# EAGLE board controller11_2 (EAGLE 9.4.1)
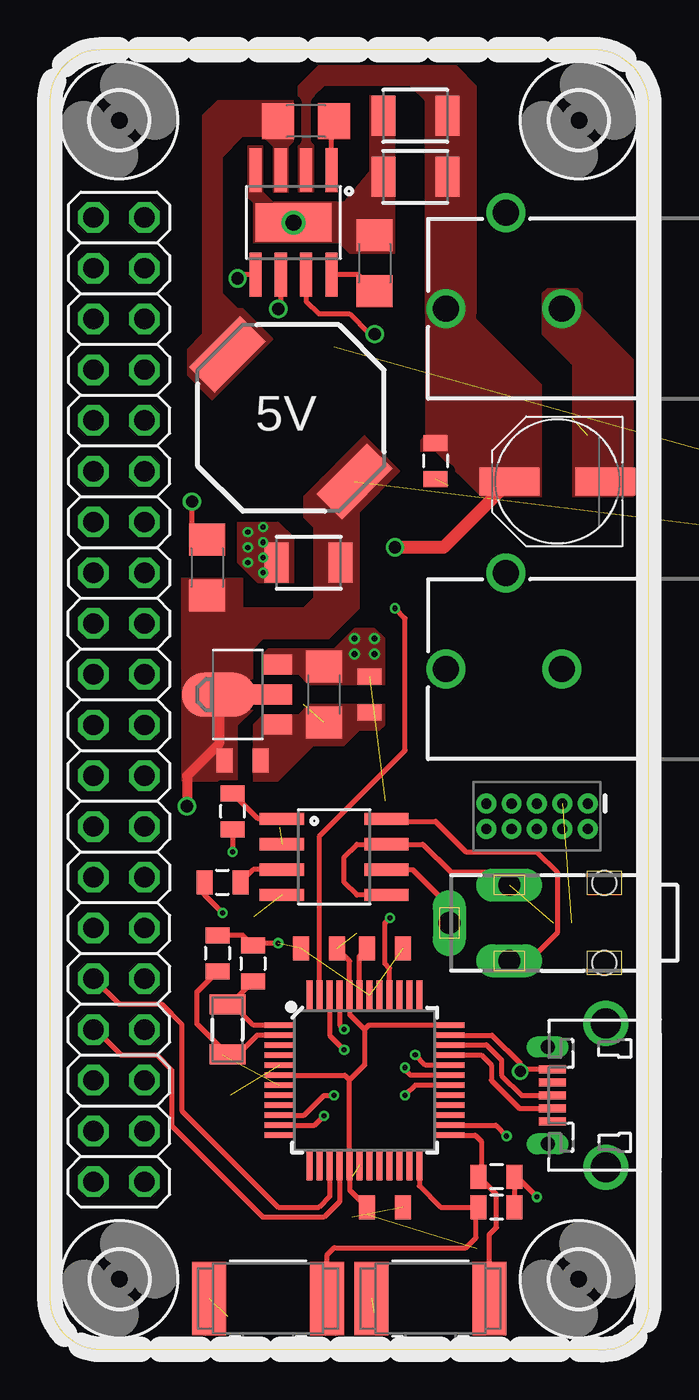
[diagram p0: board, top side]
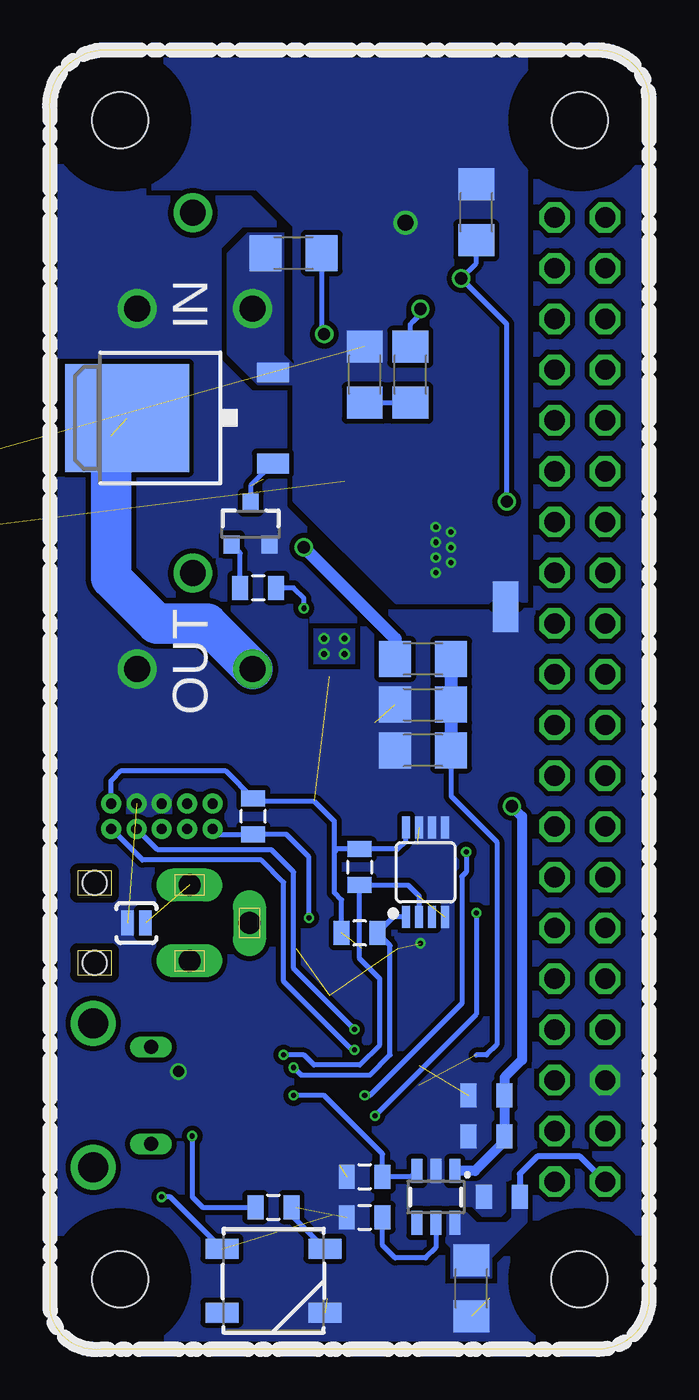
[diagram p1: board, bottom side, seen from below]

Size 29.98 x 65.04 mm. Coordinates in mm from the lower left corner, seen from the top.
Outline: 0,2.55 arc90 2.54,0.01 27.43,0.01 arc90 29.97,2.05 29.97,61.99 arc90 27.43,65.04 2.54,65.04 arc90 0,62.5 0,2.55
Copper layers (1*16): Top 0.035559375mm / dielectric 1.6mm / Bottom 0.035559375mm
Design rules "oshpark-2layer": minimum track width 6mil, minimum drill 10mil, track to track 6mil, track to pad 6mil, pad to pad 6mil, via to via 6mil, smd to smd 6mil, copper to edge 15mil, drill to drill 6mil, minimum pad ring 5mil, minimum via ring 5mil, stop-mask expansion 2.5mil, vias tented up to drill 0mil, thermal gap 10mil
Net classes: 0 default: width 0.254 mm, clearance 0.254 mm; 1 power: width 0.254 mm, clearance 0.254 mm; 2 camera_power: width 0.66 mm, clearance 0.381 mm; 3 usbsignal: width 0.254 mm, clearance 0.203 mm; 4 highpower: clearance 0.305 mm; 5 tiny: width 0.178 mm, clearance 0.178 mm

## Footprints (pad centres in the part's own frame; a part is rotated, then mirrored left to right if it is on the bottom)
SOT23-6 = smd 0.55 x 1.2: 1 0.95,1.3; 2 0,1.3; 3 -0.95,1.3; 4 -0.95,-1.3; 5 0,-1.3; 6 0.95,-1.3
0805 = smd 0.8 x 1.2: 1 -0.9,0; 2 0.9,0
1206 = smd 1.6 x 1.8: 1 -1.4,0; 2 1.4,0
PANASONIC_D = smd 3 x 1.4: + 2.4,0; - -2.4,0
1210 = smd 1.2 x 2: 1 -1.6,0; 2 1.6,0
WS2812B = smd 1.651 x 1: 1 -2.577,1.6; 2 -2.577,-1.6; 3 2.577,-1.6; 4 2.577,1.6
2,8 = hole 2.8: 0,0
SO08 = smd 0.61 x 2.21: 1 -1.905,-2.616; 2 -0.635,-2.616; 3 0.635,-2.616; 4 1.905,-2.616; 5 1.905,2.616; 6 0.635,2.616; 7 -0.635,2.616; 8 -1.905,2.616
SOT89 = smd 1 x 1.5: 1 -1.499,-1.981; 3 1.499,-1.981 | smd 1 x 2: 2 0,-1.727 | smd 2.2 x 3.7: 2@1 0,0.94
POWER_JACK_PTH_BREAD = drill 1.3: GND 0,7.9; GNDBREAK 4.8,10.7; PWR 0,13.7
2X5-PTH-1.27MM = drill 0.508 pad 1: 1 -2.54,-0.635; 2 -2.54,0.635; 3 -1.27,-0.635; 4 -1.27,0.635; 5 0,-0.635; 6 0,0.635; 7 1.27,-0.635; 8 1.27,0.635; 9 2.54,-0.635; 10 2.54,0.635
PAD-JUMPER-2-NO_YES_SILK = smd 0.635 x 1.27: 1 -0.45,0; 2 0.45,0
2X20 = drill 1.016 octagon: 1 -24.13,-1.27; 2 -24.13,1.27; 3 -21.59,-1.27; 4 -21.59,1.27; 5 -19.05,-1.27; 6 -19.05,1.27; 7 -16.51,-1.27; 8 -16.51,1.27; 9 -13.97,-1.27; 10 -13.97,1.27; 11 -11.43,-1.27; 12 -11.43,1.27; 13 -8.89,-1.27; 14 -8.89,1.27; 15 -6.35,-1.27; 16 -6.35,1.27; 17 -3.81,-1.27; 18 -3.81,1.27; 19 -1.27,-1.27; 20 -1.27,1.27; 21 1.27,-1.27; 22 1.27,1.27; 23 3.81,-1.27; 24 3.81,1.27; 25 6.35,-1.27; 26 6.35,1.27; 27 8.89,-1.27; 28 8.89,1.27; 29 11.43,-1.27; 30 11.43,1.27; 31 13.97,-1.27; 32 13.97,1.27; 33 16.51,-1.27; 34 16.51,1.27; 35 19.05,-1.27; 36 19.05,1.27; 37 21.59,-1.27; 38 21.59,1.27; 39 24.13,-1.27; 40 24.13,1.27
SRU1038 = smd 1.8 x 3.6: 1 -4.5,0; 2 4.5,0
MSOP8 = smd 0.4 x 1.1: 1 -0.975,-2.25; 2 -0.325,-2.25; 3 0.325,-2.25; 4 0.975,-2.25; 5 0.975,2.25; 6 0.325,2.25; 7 -0.325,2.25; 8 -0.975,2.25
TO252 = smd 1 x 1.6: 1 -2.28,-4.8; 2 2.28,-4.8 | smd 5.4 x 6.2: 3 0,2.5
SOT23-3 = smd 0.8 x 0.9: 1 -0.95,-1; 2 0.95,-1; 3 0,1.1
SHORT_TOP-50 = smd 1.27 x 1.27: 1 0.635,0; 2 -0.635,0
BTN_CK_KSS = smd 1.7 x 3.7: P$1 -2.95,0; P$2 2.95,0
TQFP-48 = smd 1.5 x 0.28: 1 -4.25,2.75; 2 -4.25,2.25; 3 -4.25,1.75; 4 -4.25,1.25; 5 -4.25,0.75; 6 -4.25,0.25; 7 -4.25,-0.25; 8 -4.25,-0.75; 9 -4.25,-1.25; 10 -4.25,-1.75; 11 -4.25,-2.25; 12 -4.25,-2.75; 25 4.25,-2.75; 26 4.25,-2.25; 27 4.25,-1.75; 28 4.25,-1.25; 29 4.25,-0.75; 30 4.25,-0.25; 31 4.25,0.25; 32 4.25,0.75; 33 4.25,1.25; 34 4.25,1.75; 35 4.25,2.25; 36 4.25,2.75 | smd 0.28 x 1.5: 13 -2.75,-4.25; 14 -2.25,-4.25; 15 -1.75,-4.25; 16 -1.25,-4.25; 17 -0.75,-4.25; 18 -0.25,-4.25; 19 0.25,-4.25; 20 0.75,-4.25; 21 1.25,-4.25; 22 1.75,-4.25; 23 2.25,-4.25; 24 2.75,-4.25; 37 2.75,4.25; 38 2.25,4.25; 39 1.75,4.25; 40 1.25,4.25; 41 0.75,4.25; 42 0.25,4.25; 43 -0.25,4.25; 44 -0.75,4.25; 45 -1.25,4.25; 46 -1.75,4.25; 47 -2.25,4.25; 48 -2.75,4.25
SO08' = smd 0.61 x 2.21: 1 -1.905,-2.616; 2 -0.635,-2.616; 3 0.635,-2.616; 4 1.905,-2.616; 5 1.905,2.616; 6 0.635,2.616; 7 -0.635,2.616; 8 -1.905,2.616 | smd 3.81 x 1.93: BTM 0,0 | drill 0.8: P$1 0,0
1501_05 = drill 1.1 pad 1.4 long: 1 -1.9,-8.5; 2 0,-11.5; 3 1.9,-8.5 | hole 1.2: -2,-3.75; 2,-3.75
ZX62D-B-5PA8 = smd 1.35 x 0.4: 1 4.825,1.3; 2 4.825,0.65; 3 4.825,0; 4 4.825,-0.65; 5 4.825,-1.3 | drill 1.5: S1 2.15,-3.6; S2 2.15,3.6 | drill 0.7 long: S3 5.05,2.425; S4 5.05,-2.425
CRYSTAL-SMD-3.2X1.5MM = smd 1 x 1.8: P$1 -1.25,0; P$2 1.25,0

## Placement (x,y rotation side)
AP2553  MCP4725  [SOT23-6]  10.67,7.63 0 bottom
C1  10uF  [0805]  8.13,10.68 180 bottom
C2  0.1uF  [0805]  8.13,12.71 180 bottom
C3  1.0uF  [0805]  7.37,7.63 0 bottom
C4  120uF  [1206]  8.89,3.06 90 bottom
C5  100uF  [PANASONIC_D]  25.4,43.45 180 top
C6  0.1uF  [1206]  11.3,29.99 180 bottom
C7  1.0uF  [0805]  9.65,29.48 0 top
C8  1.0uF  [1206]  13.72,32.78 270 top
C9  0.1uF  [0805]  16,32.78 270 top
C10  15pF  [0805]  10.16,19.32 270 top
C11  15pF  [0805]  8.38,19.83 270 top
C12  0.1uF  [0805]  13.46,20.08 0 top
C13  10nF  [1206]  12.83,61.48 180 top
C14  3.9nF  [1206]  11.94,48.78 90 bottom
C15  0.1uF  [1206]  16.26,54.37 270 top
C16  22uF / 6.3V  [1210]  36.2,42.43 270 top  (outside the outline)
C17  22uF / 6.3V  [1210]  12.95,39.38 0 top
C18  10uF / 25V  [1210]  18.29,61.74 180 top
C19  10uF / 25V  [1210]  18.29,58.69 0 top
C20  0.1uF  [0805]  16.76,7.13 180 top
C21  0.1uF  [0805]  16.76,20.08 0 top
D2  [WS2812B]  18.8,3.44 0 bottom
H1  MOUNT-HOLE2.8  [2,8]  26.47,3.52 0 top
H2  MOUNT-HOLE2.8  [2,8]  26.48,61.52 0 top
H3  MOUNT-HOLE2.8  [2,8]  3.48,3.52 0 top
H4  MOUNT-HOLE2.8  [2,8]  3.47,61.51 0 top
IC1  ILD213T  [SO08]  14.22,24.65 270 top
IC2  MCP170312MB  [SOT89]  9.4,32.78 90 top
J1  POWER_JACKPTH_BREAD  [POWER_JACK_PTH_BREAD]  33.53,52.08 90 top
J2  POWER_JACKPTH_BREAD  [POWER_JACK_PTH_BREAD]  33.53,34.05 90 top
J5  CORTEX_DEBUG_PTH  [2X5-PTH-1.27MM]  24.38,26.68 180 top
JP1  [PAD-JUMPER-2-NO_YES_SILK]  25.65,21.35 0 bottom
JP2  [2X20]  3.45,32.53 90 top
L2  10uH / 4A  [SRU1038]  12.06,46.62 135 top
MCP9808  V_REG_MIC5216  [MSOP8]  11.18,23.89 0 bottom
Q1  [TO252]  23.62,46.62 90 bottom
Q2  200mA/50V  [SOT23-3]  19.94,41.29 0 bottom
R1  6.8k  [1206]  14.22,48.78 90 bottom
R2  10k / 1%  [1206]  8.64,56.91 90 bottom
R3  44k / 1%  [1206]  7.87,39.13 270 top
R9  10k  [0805]  19.3,44.46 270 top
R10  1k  [0805]  19.56,38.11 180 bottom
R15  [0805]  8.64,23.38 0 top
R20  [0805]  9.14,26.94 90 top
R24  100K  [1206]  17.78,54.88 0 bottom
R_I2C_1  10k  [0805]  14.48,24.14 270 bottom
R_I2C_2  10k  [0805]  14.48,20.84 180 bottom
R_LED  4.7k  [0805]  18.8,7.13 0 bottom
R_MOSFET_USB1  ? (1%)  [0805]  14.22,6.62 0 bottom
R_MOSFET_USB3  10k  [0805]  14.22,8.65 0 bottom
RBTN  10k  [0805]  22.35,7.13 180 top
RBTN1  10k  [0805]  22.35,8.65 180 top
RRST1  10k  [0805]  19.81,26.68 90 bottom
SH2  SHORT-HT5  [SHORT_TOP-50]  7.16,37.17 90 bottom
SW1  KSS221GLFS  [BTN_CK_KSS]  10.92,2.55 0 top
SW2  KSS221GLFS  [BTN_CK_KSS]  19.05,2.55 0 top
U2  ATSAMD21G-A  [TQFP-48]  15.75,13.48 0 top
U3  MP2307  [SO08']  12.19,56.4 180 top
VD1  10k  [1206]  11.3,34.56 180 bottom
VD2  6.2k  [1206]  11.3,32.27 0 bottom
X1  1501_04  [1501_05]  31.5,21.35 270 top
X2  ZX62D-B-5PA8  [ZX62D-B-5PA8]  29.97,12.71 180 top
Y2  32.768kHz  [CRYSTAL-SMD-3.2X1.5MM]  8.89,16.02 90 top

## Library data of the parts
AP2553 = SparkFun-IC-Conversion; PROD_ID: IC-08886
C1-C3 C7 C9 C12 C20 C21 = SparkFun-Capacitors; PROD_ID: CAP-08064
C4 C8 = SparkFun-Capacitors; PROD_ID: CAP-09822
C5 = SparkFun-Capacitors; PROD_ID: CAP-12547
C6 C13-C19 = SparkFun-Capacitors
C10 C11 JP1 L2 R15 R20 R_I2C_1 R_I2C_2 R_MOSFET_USB1 R_MOSFET_USB3 RBTN RBTN1 RRST1 VD1 VD2 = SparkFun-Passives
D2 = SparkFun-LED; PROD_ID: DIO-12503
H1-H4 = holes
IC1 = SparkFun-DiscreteSemi
IC2 = linear
J1 J2 = SparkFun-Connectors; PROD_ID: PRT-10811
J5 = SparkFun-Connectors
JP2 SW1 SW2 = adafruit
MCP9808 = SparkFun-IC-Power; PROD_ID: IC-09527
Q1 = transistor-fet
Q2 = SparkFun-DiscreteSemi; PROD_ID: TRANS-00830
R1-R3 R9 R10 R24 R_LED = SparkFun-Resistors
SH2 = shorts; BOM: no
U2 = SparkFun-IC-Microcontroller; PROD_ID: IC-13064
U3 = SparkFun-AnalogIC; PROD_ID: IC-10141
X1 = con-lumberg; OC_FARNELL: 1216977; OC_NEWARK: unknown
X2 = zx62d-b-5pa8-oshpark_10; MF: Hirose; MPN: ZX62D-B-5PA8; OC_FARNELL: 2300438; OC_NEWARK: 69W0712
Y2 = samd21-temp; PROD_ID: XTAL-13062

## Nets
BATT_VCC [camera_power]: C5.+ C18.1 C19.2 J1.PWR Q1.2 R9.1 R24.1 U3.2 VD1.2
BTN1: RBTN.2 SW1.P$2 U2.24
BTN2: RBTN1.2 SW2.P$2 U2.25
CAM1: R20.1 U2.10
CAM2: R15.1 U2.11
CAM_EN: R10.1 U2.47
CAM_OUT [camera_power]: J2.PWR Q1.3
CONV_5V [power]: AP2553.1 C1.1 C2.1 C7.1 C16.2 C17.2 IC2.2@1 L2.1 R3.2
GND: AP2553.2 C1.2 C2.2 C3.1 C4.1 C5.- C6.2 C7.2 C8.2 C9.2 C10.1 C11.1 C12.1 C20.1 C21.2 D2.3 IC1.2 IC1.4 IC2.1 J1.GND J2.GND J5.3 J5.5 JP1.1 JP2.6 MCP9808.4 MCP9808.5 MCP9808.6 MCP9808.7 Q2.2 R_MOSFET_USB1.1 R_MOSFET_USB3.1 SH2.2 SW1.P$1 SW2.P$1 U2.5 U2.18 U2.35 U2.42 VD2.1 X2.5
GNDA [power]: C15.1 C16.1 C17.1 C18.2 C19.1 R1.2 R2.2 SH2.1 U3.4 U3.BTM U3.P$1
LED: R_LED.1 U2.26
MICRO_DM: U2.33 X2.2
MICRO_DP: U2.34 X2.3
MICRO_VBUS: X2.1
N$1: Q1.1 Q2.3 R9.2
N$2: C21.1 U2.43
N$3: C10.2 U2.1 Y2.P$2
N$4: AP2553.5 R_MOSFET_USB1.2
N$5: MCP9808.3
N$6: Q2.1 R10.2
N$7: D2.4 R_LED.2
N$12: IC1.6 X1.2
N$13: IC1.8 X1.3
N$15: IC1.3 R15.2
N$19: IC1.1 R20.2
N$25: C15.2 U3.8
N$26 [power]: C13.2 L2.2 U3.3
N$27: C13.1 U3.1
N$28: C14.1 R1.1
N$29: C14.2 U3.6
N$30: R2.1 R3.1 U3.5
N$32: C11.2 U2.2 Y2.P$1
N$34: IC1.5 IC1.7 JP1.2 X1.1
PB_BUCK_EN: R24.2 U3.7
RESET: J5.10 RRST1.1 U2.40
SCL: MCP9808.2 R_I2C_1.2 U2.32
SDA: MCP9808.1 R_I2C_2.1 U2.31
SWDCLK: J5.4 U2.45
SWDIO: J5.2 U2.46
USB_FAULT: U2.38
VCC [power]: C8.1 C9.1 C12.2 C20.2 D2.1 IC2.3 J5.1 MCP9808.8 R_I2C_1.1 R_I2C_2.2 RBTN1.1 RBTN.1 RRST1.2 U2.6 U2.17 U2.36 U2.44
VD_DIRECT: C6.1 U2.7 VD1.1 VD2.2
ZERO_5V [power]: AP2553.6 C3.2 C4.2 JP2.2
ZERO_EN: AP2553.3 R_MOSFET_USB3.2 U2.30
ZERO_RX [tiny]: JP2.10 U2.15
ZERO_TX [tiny]: JP2.8 U2.16

## Tracks (layer width: path | path; a pad name or v marks a point on that pad's centre or on a via)
BATT_VCC  (via drill 0.61)
  Top 0.66: C5.+ 19.7,40.15 v17.27,40.15
  Bottom 0.66: v17.27,40.15 12.7,35.58 VD1.2
  pour Top (no thermals): 18.8,52.08 18.8,45.73 18.54,45.48 18.54,44.97 19.3,44.97 21.59,42.69 24.64,42.69 24.64,48.27 21.34,51.58 21.34,52.08
  pour Top (no thermals): 18.8,51.83 18.8,62.5 18.03,63.26 13.72,63.26 13.21,62.75 13.21,57.93 12.45,57.93 12.45,63.26 13.46,64.28 20.32,64.28 21.34,63.26 21.34,51.83
  pour Bottom (no thermals): 17.78,48.27 19.56,48.27 21.08,49.8 21.08,52.34 21.08,54.37 21.08,54.62 21.08,54.88 20.07,55.89 18.29,55.89 18.29,49.8 17.78,49.29
BTN1
  Top 0.254: U2.24 18.5,8.19 19.56,7.13 21.34,7.13 | 21.34,7.13 RBTN.2 | SW1.P$2 13.87,4.74 14.22,5.09 20.83,5.09 21.34,5.6 21.34,7.13
BTN2
  Top 0.254: 21.45,3.1 SW2.P$2 22,5.76 22.35,6.11 22.35,7.76 22.01,8.11 22,8.11 RBTN1.2 21.59,8.79 21.59,10.43 21.29,10.73 U2.25
CAM1  (via drill 0.25)
  Top 0.254: R20.1 v9.14,24.91 | v14.22,12.71 13.72,12.71 12.73,11.73 U2.10
  Bottom 0.254: v9.14,24.91 9.14,23.89 9.37,23.67 9.37,17.32 13.97,12.71 v14.22,12.71
CAM2  (via drill 0.25)
  Top 0.254: U2.11 13.24,11.23 v13.72,11.7 | v8.64,21.86 7.74,22.76 R15.1
  Bottom 0.254: v13.72,11.7 8.64,16.78 v8.64,21.86
CAM_EN  (via drill 0.25)
  Top 0.254: v17.27,37.1 17.78,36.59 17.78,29.99 13.5,25.7 U2.47
  Bottom 0.254: v17.27,37.1 17.27,37.61 17.78,38.11 R10.1
CAM_OUT  (1 unrouted)
  Bottom 2.032: J2.PWR 22.11,36.34 24.64,36.34 26.92,38.62 26.92,45.73
CONV_5V  (via drill 0.61)  (1 unrouted)
  Top 0.508: IC2.2@1 8.46,30.32 6.86,28.72 v6.86,27.19
  Bottom 0.508: v6.86,27.19 6.35,26.68 6.35,14.49 7.23,13.61 C2.1 C1.1 7.23,10.41 8.7,8.93 AP2553.1
  pour Top (no thermals): 15.75,45.73 12.7,42.69 12.7,41.67 13.21,41.16 13.21,37.61 12.7,37.1 9.65,37.1 6.6,34.05 6.6,28.46 9.4,28.46 9.4,31.26 10.16,32.02 10.16,35.07 10.67,35.57 13.97,35.57 15.49,37.1 15.49,41.92 17.53,43.96
  pour Top (no thermals): 6.6,34.05 6.6,38.62 9.65,38.62 9.65,34.05
GND  (via drill 0.25, 0.55)  (12 unrouted)
  Top 0.254: X2.5 23.65,14.01 v23.55,13.91 23.55,14.31 22.13,15.73 U2.35 | C11.1 9.65,20.73 C10.1 10.28,20.33 v11.43,20.33
  pour Bottom (rank 2, no thermals): 29.84,0.01 0,0.01 0,65.16 19.05,65.16 29.84,65.04
  pour Top (no thermals): 26.42,53.1 24.89,53.1 24.64,52.85 24.64,50.81 26.16,49.29 26.16,42.69 29.21,42.69 29.21,49.54 26.67,52.08 26.67,52.85
  pour Top (no thermals): 10.67,31.76 10.16,31.26 10.16,28.46 11.43,28.46 13.21,30.24 14.73,30.24 15.49,31 16.51,31 16.76,31.26 16.76,32.27 12.95,32.27 12.45,31.76 12.19,31.76
GNDA  (via drill 0.25)  (1 unrouted)
  other vias: 9.91,40.91 9.91,40.15 9.91,39.38 10.67,38.88 10.67,39.64 10.67,40.4 10.67,41.16
  pour Bottom (no thermals): 6.22,65.29 6.22,37.48 12.62,37.48 17.65,42.52 17.65,56.27 19.58,58.2 29.97,58.2 29.97,65.04 30.23,65.29
  pour Top (no thermals): 10.16,55.39 14.48,55.39 14.99,54.88 17.27,54.88 17.27,62.75 16,62.75 16,58.94 14.73,57.42 10.16,57.42
  pour Top (no thermals): 10.67,60.21 9.91,60.21 9.91,57.67 10.16,57.42 11.18,57.42 10.67,57.93
  pour Top (no thermals): 10.16,56.4 10.41,56.4 10.41,58.69
  pour Top (no thermals): 12.19,38.37 10.67,38.37 10.41,38.37 9.65,39.13 9.4,39.38 9.4,39.64 9.4,41.42 11.43,41.42 12.19,40.65
LED  (via drill 0.25)
  Top 0.254: v22.86,10.68 22.32,11.23 U2.26
  Bottom 0.254: v22.86,10.68 22.86,7.63 22.35,7.13 R_LED.1
MICRO_DM
  Top 0.254: U2.33 20.02,14.75 21.59,14.75 22.1,14.24 22.1,13.48 23.51,12.06 X2.2
MICRO_DP
  Top 0.254: U2.34 20.03,15.25 21.84,15.25 22.61,14.49 22.61,13.73 23.62,12.71 X2.3
N$1  (1 unrouted)
  Bottom 0.254: Q1.1 19.94,43.23 Q2.3
N$2
  Top 0.254: U2.43 15.5,19.71 C21.1
N$3
  Top 0.254: U2.1 10.2,16.23 9.14,17.29 8.91,17.29 Y2.P$2 9.01,17.27 C10.2
N$4
  Bottom 0.254: R_MOSFET_USB1.2 13.32,5.21 12.7,4.59 11.18,4.59 10.67,5.09 AP2553.5
N$6
  Bottom 0.254: R10.2 20.46,39.86 Q2.1
N$7
  Bottom 0.254: D2.4 17.9,6.72 R_LED.2
N$12
  Top 0.254: IC1.6 18.16,24.02 20,22.18 X1.2
N$13
  Top 0.254: IC1.8 16.97,26.43 19.3,26.43 20.83,24.91 24.38,24.91 25.4,23.89 25.4,20.84 24.01,19.45 X1.3
N$15
  Top 0.254: 11.48,24.14 IC1.3 10.17,24.02 R15.2
N$19
  Top 0.254: 11.48,26.43 IC1.1 10.43,26.56 R20.2
N$25
  Top 0.254: C15.2 15.44,53.79 U3.8
N$26
  pour Top (no thermals): 11.18,57.93 11.94,57.93 11.94,60.21 12.19,60.47 12.19,62.5 8.38,62.5 7.62,61.74 7.62,50.81 6.86,50.05 6.86,48.78 8.13,47.51 11.18,50.56 9.65,52.08 9.4,52.08 8.64,52.85 8.64,59.7 9.65,60.72 10.67,60.72 11.18,60.21
N$27
  Top 0.254: U3.1 14.1,61.35 C13.1
N$28
  Bottom 0.254: R1.1 C14.1
N$29  (via drill 0.61)
  Top 0.254: U3.6 11.56,52.21 v11.43,52.08
  Bottom 0.254: C14.2 11.94,51.3 11.81,51.45 11.43,51.82 v11.43,52.08
N$30  (via drill 0.61)
  Top 0.254: U3.5 9.58,53.79 v9.4,53.61 | R3.1 7.11,41.29 v7.11,42.43
  Bottom 0.254: R2.1 8.64,54.37 v9.4,53.61 7.11,51.32 v7.11,42.43
N$32
  Top 0.254: U2.2 10.38,15.73 9.42,14.77 Y2.P$1 7.37,16.29 7.37,17.91 C11.2
N$34  (1 unrouted)
  Top 0.254: IC1.5 15.37,22.75 14.73,23.38 14.73,24.65 15.37,25.29 IC1.7 18.67,25.29 20.07,23.89 22.36,23.89 X1.1
PB_BUCK_EN  (via drill 0.61)
  Top 0.254: U3.7 12.83,52.46 13.46,51.83 14.99,51.83 16,50.81 v16.26,50.81
  Bottom 0.254: R24.2 16.38,50.94 v16.26,50.81
RESET  (via drill 0.25)
  Top 0.254: U2.40 17,19.08 16.76,19.32 16.76,21.35 v17.02,21.6
  Bottom 0.254: v17.02,21.6 17.02,24.65 18.15,25.78 RRST1.1 21.58,25.78 J5.10
SCL  (via drill 0.25)
  Top 0.254: U2.32 18.81,14.23 v18.29,14.75
  Bottom 0.254: v18.29,14.75 17.27,14.75 16.76,14.24 14.48,14.24 13.46,15.25 13.46,18.56 14.48,19.57 R_I2C_1.2 | 14.34,23.38 R_I2C_1.2 | R_I2C_1.2 12.05,23.24 11.5,22.69 MCP9808.2
SDA  (via drill 0.25)
  Top 0.254: U2.31 18.04,13.73 17.78,13.98 v17.78,14.11
  Bottom 0.254: v17.78,14.11 17.4,13.73 13.97,13.73 12.95,14.75 12.95,20.22 R_I2C_2.1 12.78,21.64 MCP9808.1 12.19,21.6
SWDCLK  (via drill 0.25)
  Top 0.254: U2.45 14.5,16.25 v14.73,16.02
  Bottom 0.254: v14.73,16.02 17.78,19.06 17.78,23.89 18.89,25 24.58,25 25.63,26.05 J5.4
SWDIO  (via drill 0.25)
  Top 0.254: U2.46 14,15.73 v14.73,15
  Bottom 0.254: v14.73,15 14.85,15.12 14.99,15.12 18.29,18.42 18.29,23.38 19.4,24.49 25.35,24.49 26.9,26.05 J5.2
VCC  (via drill 0.25, 0.3)  (3 unrouted)
  Top 0.254: C12.2 15,19.44 U2.44 15,16.77 15.75,16.02 | 15.86,6.73 C20.2 15,7.99 U2.17 15,13.49 | RBTN.1 RBTN1.1 23.37,8.65 v24.38,7.63 | 15,13.49 15.75,14.24 15.75,16.02 | U2.36 15.96,16.23 15.75,16.02 | U2.6 14.76,13.73 15,13.49
  Bottom 0.254: J5.1 26.92,28.46 26.42,28.97 21.2,28.97 RRST1.2 19.67,27.45 16.76,27.45 15.75,26.43 15.75,24.91 | 14.48,25.16 R_I2C_1.1 | 15.75,24.91 15.75,22.87 15.38,22.5 R_I2C_2.2 | R_I2C_1.1 15.61,25.04 15.75,24.91 | 14.34,24.91 R_I2C_1.1 | D2.1 23.96,7.63 v24.38,7.63 | MCP9808.8 12.19,26.1 12.19,25.41 12.56,25.04 R_I2C_1.1
  other vias: 15.24,35.57 16.26,35.57 16.26,34.81 15.24,34.81
  pour Top (no thermals): 10.67,33.8 12.45,33.8 12.95,33.29 16.76,33.29 16.76,35.57 16.26,36.08 15.24,36.08 14.22,35.07 13.97,35.07 11.18,35.07 10.92,35.07 10.67,34.81
  pour Bottom: 16.76,36.08 14.73,36.08 14.73,34.3 16.76,34.3
VD_DIRECT  (1 unrouted)
  Bottom 0.254: C6.1 9.9,27.7 7.62,25.41 7.62,15.25 8.13,14.75 8.64,14.75
  Bottom 0.66: VD1.1 VD2.2 C6.1
ZERO_5V
  Bottom 0.305: JP2.2 3.45,9.67 5.59,9.67 6.47,8.79 C3.2 | 9.72,6.05 AP2553.6
  pour Bottom (no thermals): 7.87,3.57 9.91,3.57 9.91,5.09 10.16,5.35 10.16,6.87 9.14,6.87 8.64,6.36 7.11,6.36 6.86,6.62 6.86,8.14 6.1,8.14 6.1,6.36 7.87,4.59
ZERO_EN  (via drill 0.25)
  Top 0.254: U2.30 18.29,13.22 v17.78,12.71
  Bottom 0.254: v17.78,12.71 16.26,12.71 13.32,9.78 R_MOSFET_USB3.2 11.9,8.65 AP2553.3
ZERO_RX
  Top 0.254: U2.15 14,7.66 13.46,7.13 11.43,7.13 6.6,11.95 6.6,16.27 5.59,17.29 3.45,17.29 JP2.10
  Bottom 0.254: JP2.10 2.54,18.56
ZERO_TX
  Top 0.254: U2.16 14.5,7.4 13.72,6.62 10.67,6.62 6.1,11.19 6.1,13.98 5.33,14.75 3.56,14.75 2.29,16.02 JP2.8

## Text on the board
tPlace: 5V | TIME | BOX | 11
bPlace: IN | OUT | VD1 | VD2